# Altium PCB BRK7360.PcbDoc (part 1 of 3)
Units mil, origin at the board's own origin, x right, y up, seen from the top; angles counter-clockwise.
Board outline 7086.61 x 3956.69 mil, 4 copper layers (L1-Top, L2-Plane-1, L3-Plane-2, L4-Bottom), stack 61.722 mil thick; 4 components, 249 nets, 395 pads, 441 vias.
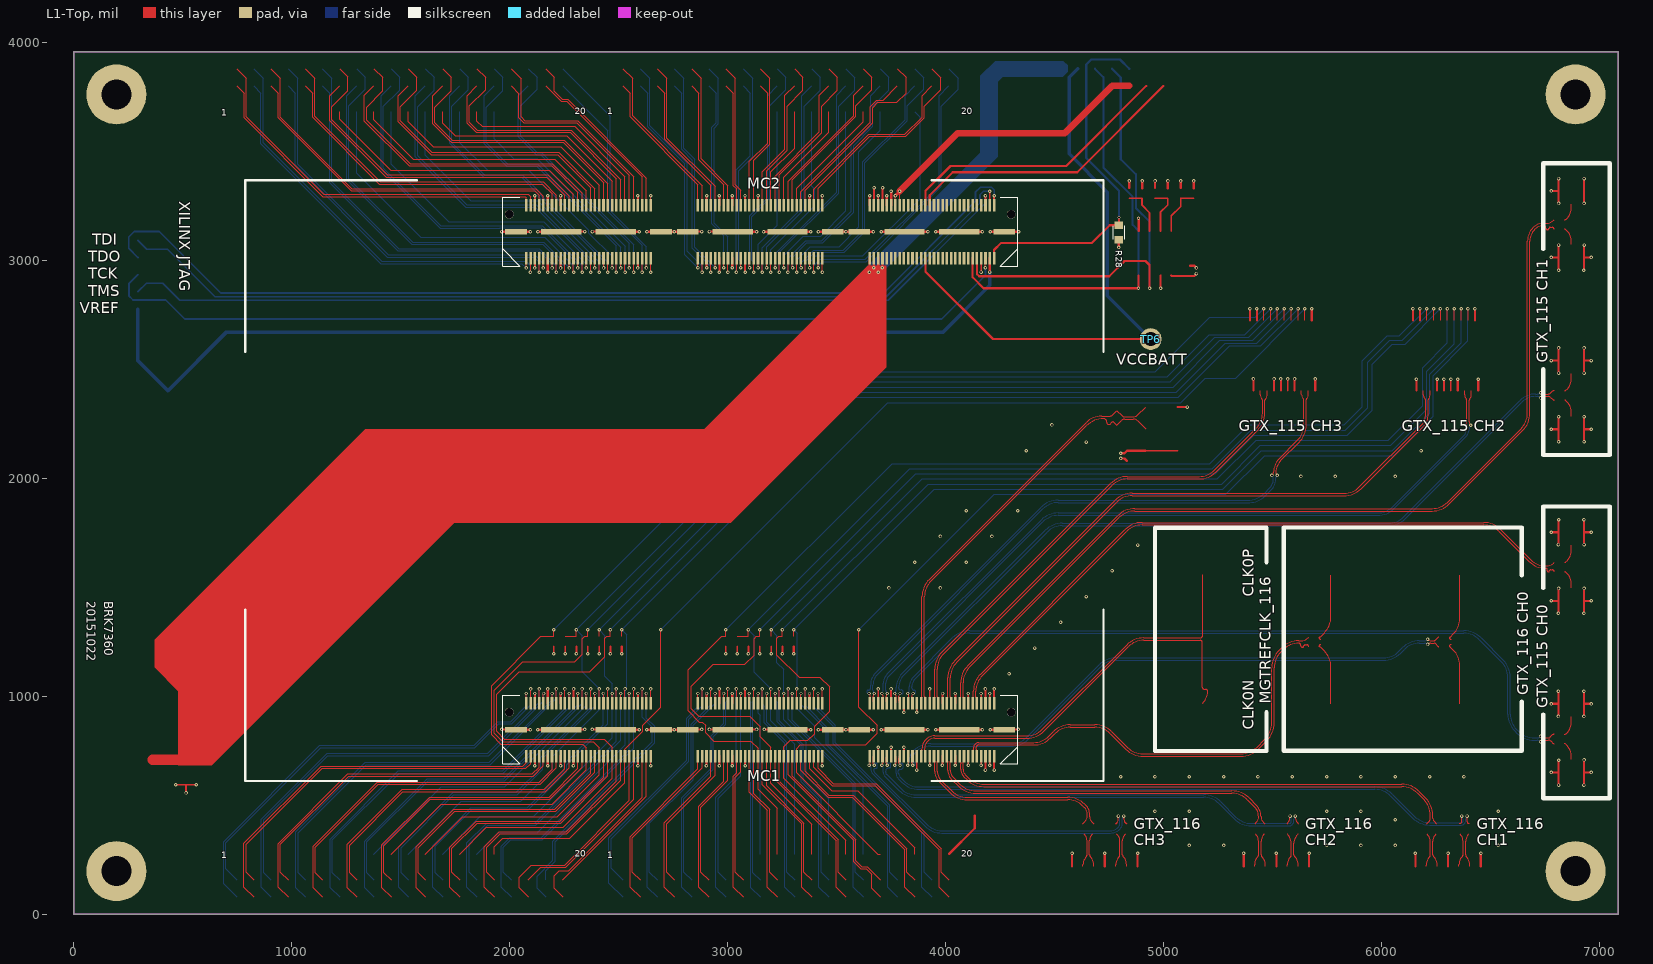
[diagram p0: L1-Top view]
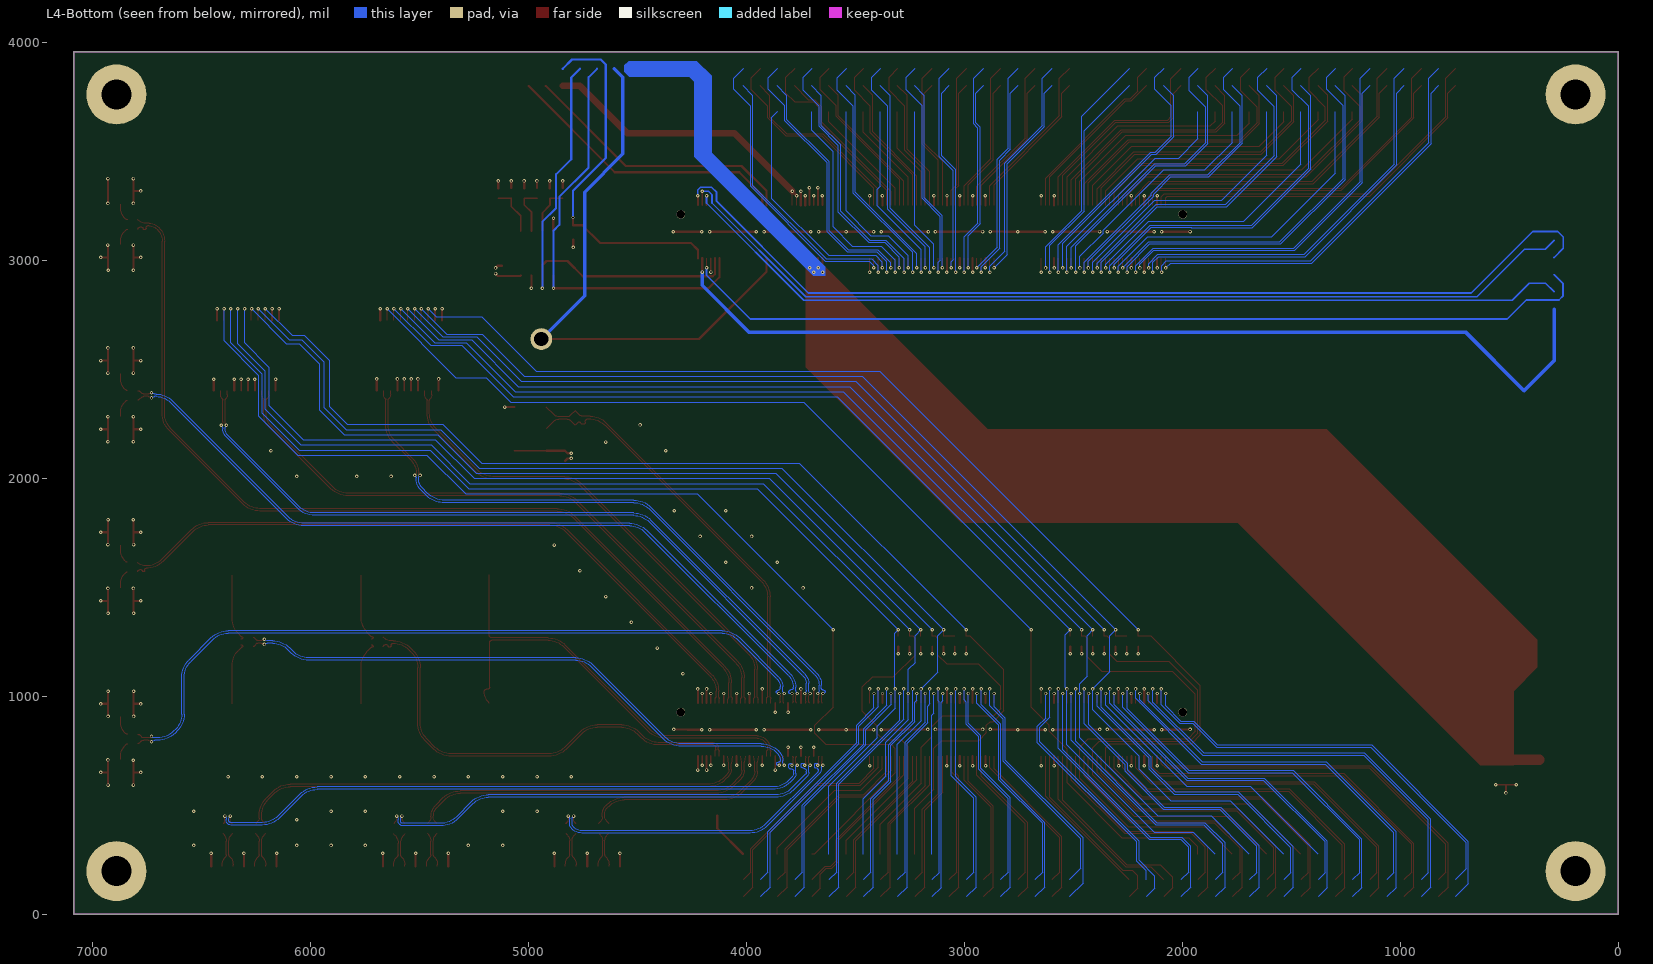
[diagram p1: L4-Bottom view, seen from below]
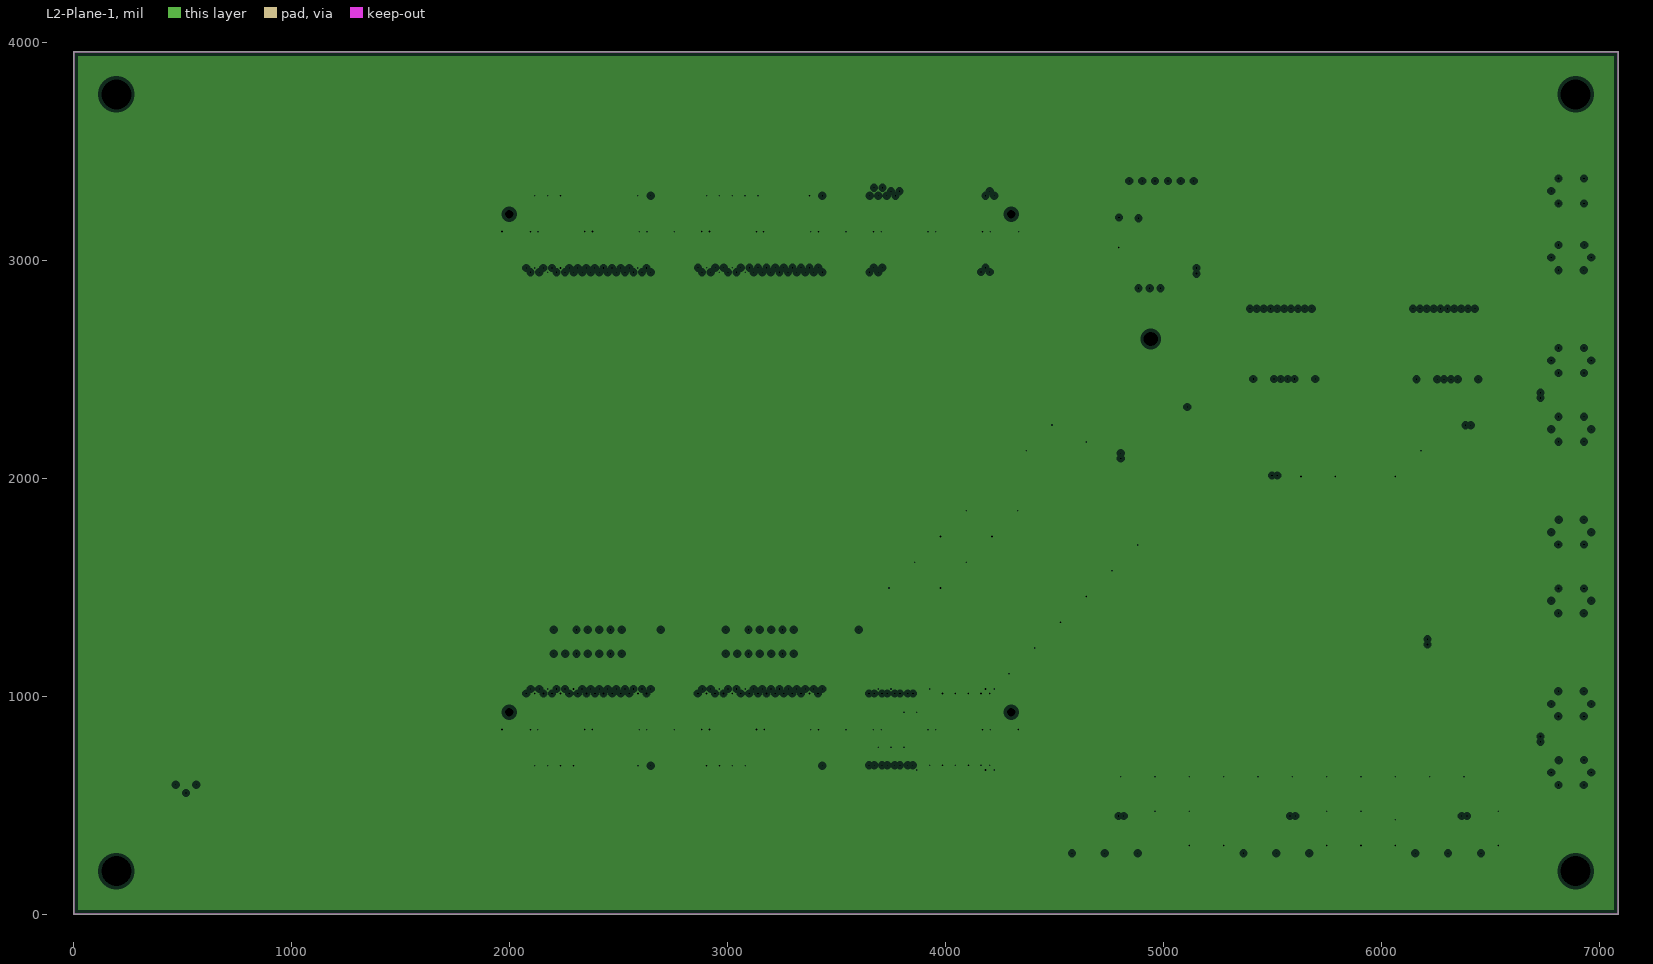
[diagram p2: L2-Plane-1, clearances drawn from the general rule]
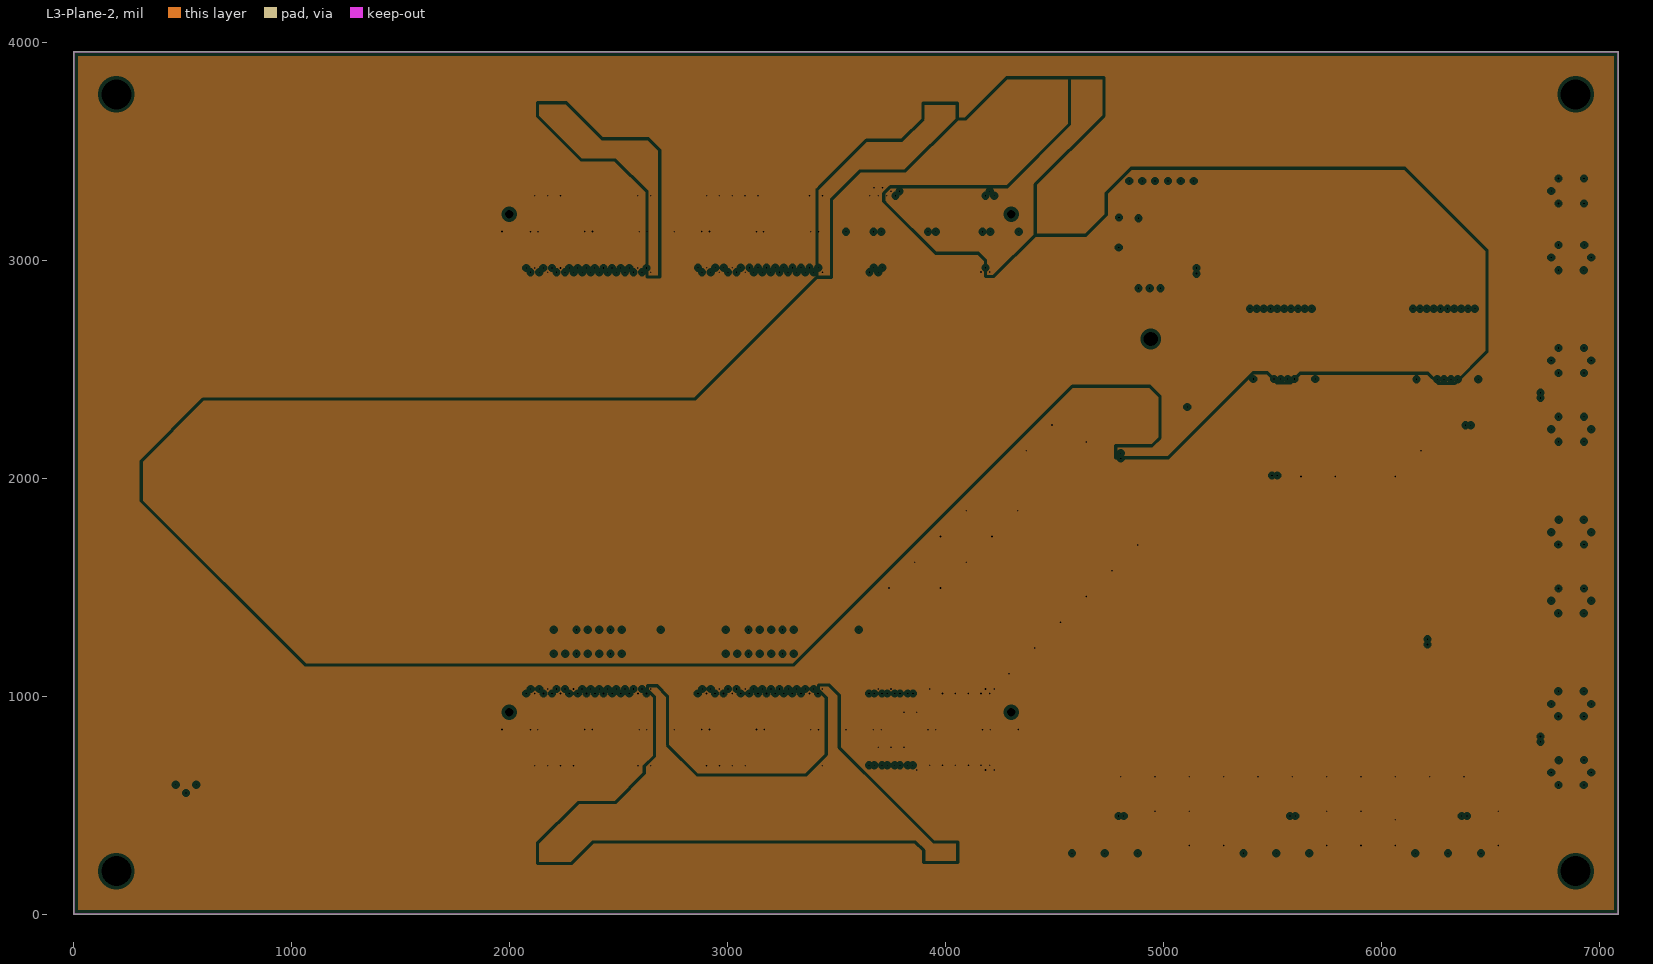
[diagram p3: L3-Plane-2, clearances drawn from the general rule]

## Layer stack, top to bottom
Top Solder: solder mask 0.4, Solder Resist, Dk 3.5
L1-Top: signal copper 1.95
Dielectric1: prepreg 2.268, FR-4, Dk 4.2
Dielectric 5: prepreg 2.268, FR-4, Dk 4.2
L2-Plane-1: plane copper 1.3, net DGND
Dielectric 4: core 14, Dk 4.2
Dielectric 6: core 6.05, Dk 4.2
Dielectric 7: core 6.05, Dk 4.2
Dielectric 8: core 6.05, Dk 4.2
Dielectric 9: core 14, Dk 4.2
L3-Plane-2: plane copper 1.3, net (Multiple Nets)
Dielectric3: prepreg 2.268, FR-4, Dk 4.2
Dielectric 10: prepreg 2.268, FR-4, Dk 4.2
L4-Bottom: signal copper 1.95
Bottom Solder: solder mask 0.4, Solder Resist, Dk 3.5

## Board outline
0,0 0,3956.69 7086.61,3956.69 7086.61,0

## Design rules (kind name [scope] priority, off if disabled: settings)
Clearance [All] p1: gap=5 ignorepadtopadclearanceinfootprint=FALSE except(0: Arc-Hole Track-Hole SMDPad-Hole THPad-Hole Via-Hole Fill-Hole Poly-Hole Region-Hole Text-Hole)
DiffPairsRouting okxDiffRouting100ohm [All] p1: maxlimit=5.98 minlimit=5.98 mostfreqgap=5.98 toplayer_minwidth=5.24 toplayer_maxwidth=5.24 toplayer_prefwidth=5.24 bottomlayer_minwidth=5.24 bottomlayer_maxwidth=5.24 bottomlayer_prefwidth=5.24 maxuncoupledlength=500 // Differential pair spacing for all 100ohm diff routes based on NTI stackup.
FabricationTestPointUsage TestPointUsage [All] p1: valid=0 allowmultiple=FALSE
FabricationTestpoint Testpoint [All] p1: side=3 testpointundercomponent=TRUE minsize=40 maxsize=100 preferedsize=60 minholesize=0 maxholesize=40 preferedholesize=32 testpointgrid=1 allowsidetop=TRUE allowsidebottom=TRUE usegrid=TRUE gridtolerance=0.01
HoleSize [All] p1: absolutevalues=TRUE maxlimit=2160 minlimit=8 maxpercent=80.000 minpercent=20.000
MatchedLengths okMatchedMGTSFP1 [InDifferentialPairClass('okMGTDiffSFP1Match')] p1: tolerance=700 checknetsindiffpair=FALSE checkdiffpairvsdiffpair=TRUE checkxsignals=TRUE checkothers=TRUE
MatchedLengths okMatchedMGTSFP0 [InDifferentialPairClass('okMGTDiffSFP0Match')] p2: tolerance=700 checknetsindiffpair=FALSE checkdiffpairvsdiffpair=TRUE checkxsignals=TRUE checkothers=TRUE
MatchedLengths okMatchedMGTSATA2 [InDifferentialPairClass('okMGTDiffSATA2Match')] p3: tolerance=700 checknetsindiffpair=FALSE checkdiffpairvsdiffpair=TRUE checkxsignals=TRUE checkothers=TRUE
MatchedLengths okMatchedMGTSATA1 [InDifferentialPairClass('okMGTDiffSATA1Match')] p4: tolerance=700 checknetsindiffpair=FALSE checkdiffpairvsdiffpair=TRUE checkxsignals=TRUE checkothers=TRUE
MatchedLengths okMatchedMGTSATA0 [InDifferentialPairClass('okMGTDiffSATA0Match')] p5: tolerance=700 checknetsindiffpair=FALSE checkdiffpairvsdiffpair=TRUE checkxsignals=TRUE checkothers=TRUE
MatchedLengths okMatchedMGTDiffPairs [InNetClass('okMGT')] p6: tolerance=5 checknetsindiffpair=TRUE checkdiffpairvsdiffpair=FALSE checkxsignals=FALSE checkothers=FALSE
MatchedLengths okMatchedMGTRefClkDiffPairs [InNetClass('okMGTRefClk')] p7: tolerance=5 checknetsindiffpair=TRUE checkdiffpairvsdiffpair=FALSE checkxsignals=FALSE checkothers=FALSE // Control skew within MGTREFCLKdiferential pairs.
MatchedLengths okMatchedMGTTX [InDifferentialPairClass('okMGTDiffTXMatch')] p8: tolerance=5000 checknetsindiffpair=TRUE checkdiffpairvsdiffpair=FALSE checkxsignals=FALSE checkothers=FALSE
MatchedLengths okMatchedMGTRX [InDifferentialPairClass('okMGTDiffRXMatch')] p9: tolerance=5000 checknetsindiffpair=TRUE checkdiffpairvsdiffpair=FALSE checkxsignals=FALSE checkothers=FALSE
PlaneClearance [All] p1: clearance=15
PlaneConnect [All] p1: planeconnectstyle=Direct reliefexpansion=20 reliefentries=4 reliefconductorwidth=10 reliefairgap=10
PolygonConnect "Via Connect" [IsVia] p1: connectstyle=Direct reliefconductorwidth=10 reliefentries=4 polygonreliefangle="90 Angle" airgapwidth=10
PolygonConnect [All] p2: connectstyle=Direct reliefconductorwidth=10 reliefentries=4 polygonreliefangle="90 Angle" airgapwidth=10
RoutingVias [All] p1: holewidth=8 width=16 viastyle="Through Hole" minholewidth=8 minwidth=16 maxholewidth=8 maxwidth=16
SilkToSolderMaskClearance SilkscreenOverComponentPads [IsPad] p1: minsilkscreentomaskgap=10 clearancetoexposedcopper=TRUE
SolderMaskExpansion [All] p1: expansion=4
Width [All] p1: maxlimit=50 minlimit=5 preferedwidth=10 minimp=50.000000 maximp=50.000000 favimp=50.000000
Width okxWidthDiff100ohm [(InDifferentialPairClass('All Differential Pairs'))] p2: maxlimit=9.5 minlimit=9.5 preferedwidth=9.5 minimp=50.000000 maximp=50.000000 favimp=50.000000 // 100 ohm differential pair routing based on 4 layer stackup from Saturn
Width okWidth50ohm [All] p3: maxlimit=40 minlimit=12 preferedwidth=12 minimp=50.000000 maximp=50.000000 favimp=50.000000 // 50 ohm SE routing based on 4 layer stackup from Saturn
23 further rules are at their usual default settings.

## Classes and differential pairs
differential pair class okMGTDiffSATA2Match: GTX116_RX3 GTX116_TX3
differential pair class okMGTDiffSATA1Match: GTX116_RX2 GTX116_TX2
differential pair class okMGTDiffSATA0Match: GTX116_RX1 GTX116_TX1
differential pair class okMGTDiffSFP1Match: GTX115_RX2 GTX115_TX2
differential pair class okMGTDiffSFP0Match: GTX115_RX3 GTX115_TX3
net class okMGT: GTX115_REFCLK0N GTX115_REFCLK0P GTX115_RXN0 GTX115_RXN1 GTX115_RXN2 GTX115_RXN3 GTX115_RXP0 GTX115_RXP1 GTX115_RXP2 GTX115_RXP3 GTX115_TXN0 GTX115_TXN1 GTX115_TXN2 GTX115_TXN3 GTX115_TXP0 GTX115_TXP1 GTX115_TXP2 GTX115_TXP3 GTX116_REFCLK0N GTX116_REFCLK0P GTX116_RXN0 GTX116_RXN1 GTX116_RXN2 GTX116_RXN3 GTX116_RXP0 GTX116_RXP1 GTX116_RXP2 GTX116_RXP3 GTX116_TXN0 GTX116_TXN1 GTX116_TXN2 GTX116_TXN3 GTX116_TXP0 GTX116_TXP1 GTX116_TXP2 GTX116_TXP3
differential pair class okMGTDiffPairs: GTX115_REFCLK0 GTX115_RX0 GTX115_RX1 GTX115_RX2 GTX115_RX3 GTX115_TX0 GTX115_TX1 GTX115_TX2 GTX115_TX3 GTX116_REFCLK0 GTX116_RX0 GTX116_RX1 GTX116_RX1_C GTX116_RX2 GTX116_RX2_C GTX116_RX3 GTX116_RX3_C GTX116_TX0 GTX116_TX1 GTX116_TX1_C GTX116_TX2 GTX116_TX2_C GTX116_TX3 GTX116_TX3_C
differential pair class okMGTDiffTXMatch: GTX115_TX0 GTX115_TX1 GTX115_TX2 GTX115_TX3 GTX116_TX0 GTX116_TX1 GTX116_TX2 GTX116_TX3
differential pair class okMGTDiffRXMatch: GTX115_RX0 GTX115_RX1 GTX115_RX2 GTX115_RX3 GTX116_RX0 GTX116_RX1 GTX116_RX2 GTX116_RX3
net class okMGTRefClk: GTX115_REFCLK0N GTX115_REFCLK0P GTX116_REFCLK0N GTX116_REFCLK0P
differential pair GTX116_REFCLK0: +GTX116_REFCLK0P -GTX116_REFCLK0N
differential pair GTX115_REFCLK0: +GTX115_REFCLK0P -GTX115_REFCLK0N
differential pair GTX115_RX0: +GTX115_RXP0 -GTX115_RXN0
differential pair GTX115_RX1: +GTX115_RXP1 -GTX115_RXN1
differential pair GTX115_RX2: +GTX115_RXP2 -GTX115_RXN2
differential pair GTX115_RX3: +GTX115_RXP3 -GTX115_RXN3
differential pair GTX115_TX0: +GTX115_TXP0 -GTX115_TXN0
differential pair GTX115_TX1: +GTX115_TXP1 -GTX115_TXN1
differential pair GTX115_TX2: +GTX115_TXP2 -GTX115_TXN2
differential pair GTX115_TX3: +GTX115_TXP3 -GTX115_TXN3
differential pair GTX116_RX0: +GTX116_RXP0 -GTX116_RXN0
differential pair GTX116_RX1: +GTX116_RXP1 -GTX116_RXN1
differential pair GTX116_RX2: +GTX116_RXP2 -GTX116_RXN2
differential pair GTX116_RX3: +GTX116_RXP3 -GTX116_RXN3
differential pair GTX116_TX0: +GTX116_TXP0 -GTX116_TXN0
differential pair GTX116_TX1: +GTX116_TXP1 -GTX116_TXN1
differential pair GTX116_TX2: +GTX116_TXP2 -GTX116_TXN2
differential pair GTX116_TX3: +GTX116_TXP3 -GTX116_TXN3
differential pair GTX116_RX1_C: +GTX116_RXP1_C -GTX116_RXN1_C
differential pair GTX116_RX2_C: +GTX116_RXP2_C -GTX116_RXN2_C
differential pair GTX116_RX3_C: +GTX116_RXP3_C -GTX116_RXN3_C
differential pair GTX116_TX1_C: +GTX116_TXP1_C -GTX116_TXN1_C
differential pair GTX116_TX2_C: +GTX116_TXP2_C -GTX116_TXN2_C
differential pair GTX116_TX3_C: +GTX116_TXP3_C -GTX116_TXN3_C

## Components (designator, comment, footprint, x,y, rotation, side; value= is the part's Value field where it differs from the comment)
MC1 "QTH-090-01-F-D-A" QTH-090-01-X-D 3149.61,846.46 r0 top locked
MC2 "QTH-090-01-F-D-A" QTH-090-01-X-D 3149.61,3129.92 r0 top locked
R28 "CRCW06030000Z0EA" RESC1608N 4795,3126.54 r90 top value=0
TP6 "VCCBATT" TP_MED 4940.94,2637.8 r0 top

## Footprints (in the part's own frame and the unit in brackets; to place one, negate y for a bottom-side part, rotate by r counter-clockwise, add the part's x,y. Pads: shape width x height; smd on the part's side, far side on the other; paste and mask are expansions set on the pad)
QTH-090-01-X-D [mm]
  rect 2.54x0.64 smd: 0(-28.445,0) 0(-11.555,0) 0(-8.445,0) 0(8.445,0) 0(11.555,0) 0(28.445,0)
  rect 4.7x0.64 smd: 0(-23.175,0) 0(-16.825,0) 0(-3.175,0) 0(3.175,0) 0(16.825,0) 0(23.175,0)
  rect 0.3x1.45 smd: 1(-27.25,3.09) 2(-27.25,-3.09) 3(-26.75,3.09) 4(-26.75,-3.09) 5(-26.25,3.09) 6(-26.25,-3.09) 7(-25.75,3.09) 8(-25.75,-3.09) 9(-25.25,3.09) 10(-25.25,-3.09) 11(-24.75,3.09) 12(-24.75,-3.09) 13(-24.25,3.09) 14(-24.25,-3.09) 15(-23.75,3.09) 16(-23.75,-3.09) 17(-23.25,3.09) 18(-23.25,-3.09) 19(-22.75,3.09) 20(-22.75,-3.09) 21(-22.25,3.09) 22(-22.25,-3.09) 23(-21.75,3.09) 24(-21.75,-3.09) 25(-21.25,3.09) 26(-21.25,-3.09) 27(-20.75,3.09) 28(-20.75,-3.09) 29(-20.25,3.09) 30(-20.25,-3.09) 31(-19.75,3.09) 32(-19.75,-3.09) 33(-19.25,3.09) 34(-19.25,-3.09) 35(-18.75,3.09) 36(-18.75,-3.09) 37(-18.25,3.09) 38(-18.25,-3.09) 39(-17.75,3.09) 40(-17.75,-3.09) 41(-17.25,3.09) 42(-17.25,-3.09) 43(-16.75,3.09) 44(-16.75,-3.09) 45(-16.25,3.09) 46(-16.25,-3.09) 47(-15.75,3.09) 48(-15.75,-3.09) 49(-15.25,3.09) 50(-15.25,-3.09) 51(-14.75,3.09) 52(-14.75,-3.09) 53(-14.25,3.09) 54(-14.25,-3.09) 55(-13.75,3.09) 56(-13.75,-3.09) 57(-13.25,3.09) 58(-13.25,-3.09) 59(-12.75,3.09) 60(-12.75,-3.09) 61(-7.25,3.09) 62(-7.25,-3.09) 63(-6.75,3.09) 64(-6.75,-3.09) 65(-6.25,3.09) 66(-6.25,-3.09) 67(-5.75,3.09) 68(-5.75,-3.09) 69(-5.25,3.09) 70(-5.25,-3.09) 71(-4.75,3.09) 72(-4.75,-3.09) 73(-4.25,3.09) 74(-4.25,-3.09) 75(-3.75,3.09) 76(-3.75,-3.09) 77(-3.25,3.09) 78(-3.25,-3.09) 79(-2.75,3.09) 80(-2.75,-3.09) 81(-2.25,3.09) 82(-2.25,-3.09) 83(-1.75,3.09) 84(-1.75,-3.09) 85(-1.25,3.09) 86(-1.25,-3.09) 87(-0.75,3.09) 88(-0.75,-3.09) 89(-0.25,3.09) 90(-0.25,-3.09) 91(0.25,3.09) 92(0.25,-3.09) 93(0.75,3.09) 94(0.75,-3.09) 95(1.25,3.09) 96(1.25,-3.09) 97(1.75,3.09) 98(1.75,-3.09) 99(2.25,3.09) 100(2.25,-3.09) 101(2.75,3.09) 102(2.75,-3.09) 103(3.25,3.09) 104(3.25,-3.09) 105(3.75,3.09) 106(3.75,-3.09) 107(4.25,3.09) 108(4.25,-3.09) 109(4.75,3.09) 110(4.75,-3.09) 111(5.25,3.09) 112(5.25,-3.09) 113(5.75,3.09) 114(5.75,-3.09) 115(6.25,3.09) 116(6.25,-3.09) 117(6.75,3.09) 118(6.75,-3.09) 119(7.25,3.09) 120(7.25,-3.09) 121(12.75,3.09) 122(12.75,-3.09) 123(13.25,3.09) 124(13.25,-3.09) 125(13.75,3.09) 126(13.75,-3.09) 127(14.25,3.09) 128(14.25,-3.09) 129(14.75,3.09) 130(14.75,-3.09) 131(15.25,3.09) 132(15.25,-3.09) 133(15.75,3.09) 134(15.75,-3.09) 135(16.25,3.09) 136(16.25,-3.09) 137(16.75,3.09) 138(16.75,-3.09) 139(17.25,3.09) 140(17.25,-3.09) 141(17.75,3.09) 142(17.75,-3.09) 143(18.25,3.09) 144(18.25,-3.09) 145(18.75,3.09) 146(18.75,-3.09) 147(19.25,3.09) 148(19.25,-3.09) 149(19.75,3.09) 150(19.75,-3.09) 151(20.25,3.09) 152(20.25,-3.09) 153(20.75,3.09) 154(20.75,-3.09) 155(21.25,3.09) 156(21.25,-3.09) 157(21.75,3.09) 158(21.75,-3.09) 159(22.25,3.09) 160(22.25,-3.09) 161(22.75,3.09) 162(22.75,-3.09) 163(23.25,3.09) 164(23.25,-3.09) 165(23.75,3.09) 166(23.75,-3.09) 167(24.25,3.09) 168(24.25,-3.09) 169(24.75,3.09) 170(24.75,-3.09) 171(25.25,3.09) 172(25.25,-3.09) 173(25.75,3.09) 174(25.75,-3.09) 175(26.25,3.09) 176(26.25,-3.09) 177(26.75,3.09) 178(26.75,-3.09) 179(27.25,3.09) 180(27.25,-3.09)
  round 1.02 hole 1.02 unplated: MH(-29.24,2.03) MH(29.24,2.03)
  silkscreen extent -30,-4 30,4
RESC1608N [mm] "Chip Resistor, Body 1.6x0.8mm, IPC Medium Density"
  rect 0.9x1 smd: 1(-0.85,0) 2(0.85,0)
  silkscreen extent -0.77,-0.68 0.78,0.68, body extent -0.85,-0.48 0.85,0.48, height 0.6
TP_MED [mil] "Testpoint - medium sized"
  round 100 hole 65: 1(0,0)

## Part data
MC1 MC2: library part 000876, "0.5mm hi-speed, high-density header (Female)", Manufacturer=Samtec, Description 2="180-pin, ground plane in middle", Manufacturer_PN=QTH-090-01-F-D-A, partnumber=000876, updated_on="3/23/2015 1:16:30 PM"
R28: library part 000411, "Zero-ohm resistor", Manufacturer=Vishay, ValueFloat=0, Description 2="SM-0603, 1/10W, 20 mOhm max", Manufacturer_PN=CRCW06030000Z0EA, partnumber=000411, updated_on="2/12/2015 9:26:27 AM"
TP6: library part 000265, "Testpoint", Manufacturer="Keystone Electronics", Manufacturer_PN=5007, Description 2="0.063 in. diameter, compact, White", NoLoad=NoLoad, partnumber=000265, updated_on="1/24/2015 12:30:04 PM"

## Free pads (board coordinates)
  round 275.59 hole 137.8: MH(196.85,196.85) MH(196.85,3759.84) MH(6889.76,196.85) MH(6889.76,3759.84)

## Via types
v1: diameter 16, hole 8, L1-Top to L4-Bottom, tented both sides, 441 vias

## Nets (pads, with @x,y where several pads share a name; then routed paths per layer and width w, separated by ;. In a path a pad name is that pad's centre, name@x,y a point inside that pad or via, vN(x,y) a via of type N, cw(c..) or ccw(c..) an arc to the next point about the centre after c; other vN are vias at no path point)
+1.0VDD: MC2.133 MC2.135 | length 1390.7
  L1-Top w5: MC2.133@3769.69,3251.58 3769.69,3294.69 v1(3770,3295) ; v1(3789,3316) 3789.37,3315.63 MC2.135@3789.37,3251.58
  L1-Top w16: v1(3770,3295) 3789,3314 v1(3789,3316)
  L1-Top w30: v1(3789,3316) 4055.68,3582.68 4547.24,3582.68 4763.78,3799.21 4842.52,3799.21
+1.8VDD: MC2.129 MC2.131 MC2.178 | length 4633.2
  L1-Top w12: v1(3730,3295) 3730.31,3294.69 MC2.129@3730.31,3251.58 ; MC2.131@3750,3251.58 v1(3750,3316) ; MC2.178@4202.76,3008.27 4202.76,2945.24 v1(4203,2945)
  L4-Bottom w16: 295.28,2775.59 295.28,2539.37 433.07,2401.57 701.5,2670 3989,2670 4203,2884 v1(4203,2945)
+3.3VDD: MC2.121 MC2.123 MC2.125 MC2.127 MC2.174 | length 311.8
  L1-Top w8: MC2.121@3651.57,3251.58 3651.57,3294.57 v1(3652,3295) ; MC2.123@3671.26,3251.58 3671.26,3331.26 v1(3672,3332) ; MC2.125@3690.94,3251.58 3690.94,3294.94 v1(3691,3295) ; MC2.127@3710.63,3251.58 3710.63,3331.63 v1(3711,3332) ; v1(4163,2945) 4163.39,2945.39 MC2.174@4163.39,3008.27
+5VDC: MC2.122 MC2.124 MC2.126 MC2.128 | length 369.7
  L1-Top w10: v1(3651,2944) 3651.57,2944.57 MC2.122@3651.57,3008.27 ; v1(3671,2965) 3671.26,2965.26 MC2.124@3671.26,3008.27 ; MC2.126@3690.94,3008.27 3690.94,2944.06 v1(3691,2944) ; v1(3710,2965) 3710.63,2965.63 MC2.128@3710.63,3008.27
  L1-Top w48: 362.2,708.66 515.43,708.66 516,708.09
ADC_VN_X: MC2.149 | length 1326.4
  L1-Top w10: MC2.149@3927.17,3251.58 3927.17,3297.17 4033,3403 4603.79,3403 5000,3799.21
ADC_VP_X: MC2.147 | length 1278.9
  L1-Top w10: MC2.147@3907.48,3251.58 3907.48,3316.93 4022.55,3432 4554.05,3432 4921.26,3799.21
DGND: MC1.0 MC1.5 MC1.6 MC1.11 MC1.12 MC1.17 MC1.18 MC1.23 MC1.24 MC1.53 MC1.54 MC1.65 MC1.66 MC1.71 MC1.72 MC1.77 MC1.78 MC1.83 MC1.84 MC1.113 MC1.125 MC1.126 MC1.131 MC1.132 MC1.137 MC1.138 MC1.143 MC1.144 MC1.149 MC1.150 MC1.155 MC1.156 MC1.161 MC1.162 MC1.167 MC1.168 MC1.173 MC1.174 MC1.175 MC1.176 MC1.177 MC1.178 MC1.179 MC1.180 MC2.0 MC2.5 MC2.6 MC2.11 MC2.12 MC2.17 MC2.18 MC2.53 MC2.54 MC2.65 MC2.66 MC2.71 MC2.72 MC2.77 MC2.78 MC2.83 MC2.84 MC2.89 MC2.113 R28.1 | length 7116.3
  L1-Top w8: MC1.126@3690.95,724.8 3690.95,765.95 v1(3691,766) ; MC1.125@3690.95,968.11 3690.95,1032.95 v1(3691,1033) ; MC1.132@3750,724.8 v1(3750,766) ; MC1.131@3750,968.11 v1(3750,1033) ; v1(3809,766) 3809.06,765.94 MC1.138@3809.06,724.8 ; v1(3809,926) v1(3809,926) MC1.137@3809.06,968.11 ; v1(3868,661) 3868.11,661.11 MC1.144@3868.11,724.8 ; v1(3868,926) 3868,968.11 MC1.143@3868.11,968.11 ; v1(3926.89,683) 3927.17,683.28 MC1.150@3927.17,724.8 ; v1(3927,1033) 3927.17,1032.83 MC1.149@3927.17,968.11 ; v1(3985.89,683) 3986.22,683.33 MC1.156@3986.22,724.8 ; v1(3986,1012) 3986.22,1011.78 MC1.155@3986.22,968.11 ; v1(4044.89,683) ccw(c4043.96,683.93) 4045.28,683.93 MC1.162@4045.28,724.8 ; v1(4045,1012) 4045.28,1011.72 MC1.161@4045.28,968.11 ; v1(4104,1012) 4104.33,1011.67 MC1.167@4104.33,968.11 ; MC1.168@4104.33,724.8 4104.33,684.35 ccw(c4106.24,684.35) v1(4104.89,683) ; v1(4163,683) ccw(c4162.07,683.93) 4163.39,683.93 MC1.174@4163.39,724.8 ; v1(4163,1012) 4163.39,1011.61 MC1.173@4163.39,968.11 ; v1(4183,661) v1(4183,661) MC1.176@4183.07,724.8 ; v1(4183,1033) 4183.07,1032.93 MC1.175@4183.07,968.11 ; MC1.178@4202.76,724.8 4202.76,683.24 v1(4203,683) ; MC1.177@4202.76,968.11 4202.76,1011.76 v1(4203,1012) ; MC1.180@4222.44,724.8 4222.44,662.35 ccw(c4224.35,662.35) v1(4223,661) ; MC1.179@4222.44,968.11 4222.44,1032.44 v1(4223,1033)
  L1-Top w10: v1(1964.89,847) 2029.18,847 MC1.0@2029.72,846.46 2030.18,846 v1(2095.89,846) ; v1(1965,3131) 1966.08,3129.92 MC2.0@2029.72,3129.92 2095.92,3129.92 v1(2096,3130) ; v1(2115.89,681) 2116.14,681.25 MC1.6@2116.14,724.8 ; v1(2115.89,1012) 2116.14,1011.75 MC1.5@2116.14,968.11 ; v1(2116,2964) 2116.14,2964.14 MC2.6@2116.14,3008.27 ; v1(2116,3295) 2116.14,3294.86 MC2.5@2116.14,3251.58 ; v1(2129.89,846) 2236.75,846 MC1.0@2237.21,846.46 2237.75,847 v1(2344.89,847) ; v1(2130,3130) 2237.13,3130 2238.13,3131 v1(2345,3131) ; v1(2174.89,681) 2175.2,681.31 MC1.12@2175.2,724.8 ; v1(2174.89,1033) 2175.2,1032.69 MC1.11@2175.2,968.11 ; v1(2175,2944) 2175.2,2944.2 MC2.12@2175.2,3008.27 ; v1(2175,3295) 2175.2,3294.8 MC2.11@2175.2,3251.58 ; v1(2233.89,681) 2234.25,681.36 MC1.18@2234.25,724.8 ; v1(2233.89,1012) 2234.25,1011.64 MC1.17@2234.25,968.11 ; v1(2234,2964) 2234.25,2964.25 MC2.18@2234.25,3008.27 ; v1(2234,3295) 2234.25,3294.75 MC2.17@2234.25,3251.58 ; v1(2292.89,681) 2293.31,681.42 MC1.24@2293.31,724.8 ; MC1.23@2293.31,968.11 2293.31,1032.42 v1(2293.89,1033) ; v1(2379.89,847) 2486.66,847 MC1.0@2487.21,846.46 2487.66,846 v1(2594.89,846) ; v1(2380,3131) 2486.13,3131 2487.13,3130 v1(2595,3130) ; v1(2588,2964) 2588.58,2964.58 MC2.54@2588.58,3008.27 ; v1(2588,3295) 2588.58,3294.42 MC2.53@2588.58,3251.58 ; MC1.54@2588.58,724.8 2588.58,681.31 v1(2588.89,681) ; MC1.53@2588.58,968.11 2588.58,1011.69 v1(2588.89,1012) ; v1(2629.89,846) 2694.23,846 MC1.0@2694.69,846.46 2695.14,846 v1(2755.89,846) 2816.67,846 MC1.0@2817.13,846.46 2817.67,847 v1(2881.89,847) ; v1(2630,3130) v1(2756,3130) 2817.05,3130 2818.05,3131 v1(2882,3131) ; v1(2902.89,681) 2903.54,681.65 MC1.66@2903.54,724.8 ; MC1.65@2903.54,968.11 2903.54,1011.65 v1(2903.89,1012) ; MC2.66@2903.54,3008.27 2903.54,2965.46 v1(2904,2965) ; MC2.65@2903.54,3251.58 2903.54,3294.54 v1(2904,3295) ; v1(2916.89,847) 3024.06,847 MC1.0@3024.61,846.46 3025.15,847 v1(3132.89,847) ; v1(2917,3131) 3023.53,3131 3024.53,3130 v1(3133,3130) ; v1(2961.89,1033) 2962.6,1032.29 MC1.71@2962.6,968.11 ; v1(2962,2944) 2962.6,2944.6 MC2.72@2962.6,3008.27 ; v1(2962,3295) 2962.6,3294.4 MC2.71@2962.6,3251.58 ; MC1.72@2962.6,724.8 2962.6,681.4 v1(2963,681) ; v1(3021,3295) 3021.65,3294.35 MC2.77@3021.65,3251.58 ; MC1.78@3021.65,724.8 3021.65,681.35 v1(3022,681) ; MC1.77@3021.65,968.11 3021.65,1011.76 v1(3021.89,1012) ; MC2.78@3021.65,3008.27 3021.65,2965.35 v1(3022,2965) ; v1(3080,3295) 3080.71,3294.29 MC2.83@3080.71,3251.58 ; MC1.84@3080.71,724.8 3080.71,681.29 v1(3081,681) ; MC1.83@3080.71,968.11 3080.71,1032.82 v1(3080.89,1033) ; MC2.84@3080.71,3008.27 3080.71,2944.29 v1(3081,2944) ; MC2.89@3139.76,3251.58 3139.76,3294.76 v1(3140,3295) ; v1(3165,3130) v1(3382,3130) ; v1(3168,847) 3274.06,847 MC1.0@3274.61,846.46 3275.06,846 v1(3381.89,846) ; v1(3375.89,1012) 3375.98,1011.9 MC1.113@3375.98,968.11 ; MC2.113@3375.98,3251.58 v1(3376,3295) ; v1(3416.89,846) 3481.63,846 MC1.0@3482.09,846.46 3482.54,846 v1(3542.89,846) 3604.07,846 MC1.0@3604.53,846.46 3604.99,846 v1(3668.89,846) ; v1(3417,3130) 3482.01,3130 MC2.0@3482.09,3129.92 3482.16,3130 v1(3543,3130) 3604.45,3130 MC2.0@3604.53,3129.92 3604.61,3130 v1(3669,3130) ; v1(3704.89,846) 3811.55,846 MC1.0@3812.01,846.46 3812.47,846 v1(3918.89,846) ; v1(3705,3130) 3811.93,3130 MC2.0@3812.01,3129.92 3812.09,3130 v1(3919,3130) ; v1(3954.89,846) 4061.55,846 MC1.0@4062.01,846.46 4062.47,846 v1(4168.89,846) ; v1(3955,3130) 4061.93,3130 MC2.0@4062.01,3129.92 4062.09,3130 v1(4169,3130) ; v1(4204.89,846) 4269.03,846 MC1.0@4269.49,846.46 4270.03,847 v1(4333.89,847) ; v1(4205,3130) 4269.41,3130 MC2.0@4269.49,3129.92 4269.57,3130 v1(4336,3130)
  L1-Top w12: v1(4795,3058) R28.1@4795,3093.07
  other v1: 5118.11,314.96 5275.59,314.96 5748.03,314.96 5905.51,314.96 6062.99,314.96 6535.43,314.96 6062.99,433.07 4960.63,472.44 5118.11,472.44 5748.03,472.44 5905.51,472.44 6535.43,472.44 4803.15,629.92 4960.63,629.92 5118.11,629.92 5275.59,629.92 5433.07,629.92 5590.55,629.92 5748.03,629.92 5905.51,629.92 6062.99,629.92 6220.47,629.92 6377.95,629.92 4291.34,1102.36 4409.45,1220.47 4527.56,1338.58 4645.67,1456.69 3740.16,1496.06 3976.38,1496.06 4763.78,1574.8 3858.27,1614.17 4094.49,1614.17 4881.89,1692.91 3976.38,1732.28 4212.6,1732.28 4094.49,1850.39 4330.71,1850.39 5629.92,2007.87 5787.4,2007.87 6062.99,2007.87 4370.08,2125.98 6181.1,2125.98 4645.67,2165.35 4488.19,2244.09
FX3_SCL: MC2.172 | length 2089.6
  L1-Top w10: MC2.172@4143.7,3008.27 4143.7,2936.43 4154.13,2926 4751,2926 4821,2996 4917,2996 4935.63,2977.37 4935.63,2871.37 v1(4936,2871)
  L4-Bottom w10: 4763.78,3877.95 4804,3837.73 4804,3463 4873,3394 4873,3239 4936,3176 v1(4936,2871)
FX3_SDA: MC2.170 | length 2017.1
  L1-Top w10: MC2.170@4124.02,3008.27 4124.02,2920.98 4174,2871 v1(4885,2871) 4885.63,2871.63 4885.63,2929.13
  L4-Bottom w10: 4685.04,3877.95 4724,3838.99 4724,3425 4858,3291 4858,3162 4885,3135 v1(4885,2871)
GTX115_REFCLK0N: MC1.147 | length 1911.8
  L1-Top w5.24: MC1.147@3907.48,968.11 3907.48,989.01 ccw(c3899.01,989.01) 3905,995 cw(c3909.83,999.83) 3903,999.83 3903,1455.58 cw(c4003,1455.58) 3932.29,1526.29 4646.2,2240.2 cw(c4724.85,2161.56) 4724.85,2272.78 cw(c4724.85,2258.63) 4739,2258.63 4739,2256 ccw(c4749,2256) 4749,2246 4750,2246 ccw(c4750,2253.24) 4755.12,2248.12 4762.88,2255.88 cw(c4768,2250.76) 4768,2258 cw(c4768,2251.88) 4772.33,2256.21 4786,2242.54 4808.09,2264.63 cw(c4822,2250.72) 4822,2270.39 4862,2270.39 cw(c4862,2243.41) 4881.08,2262.49 4917.61,2225.95
GTX115_REFCLK0P: MC1.145 | length 1912.9
  L1-Top w5.24: MC1.145@3887.8,968.11 3887.8,988.68 cw(c3895.32,988.68) 3890,994 ccw(c3885.7,998.3) 3891.78,998.3 3891.78,1455.58 cw(c4003,1455.58) 3924.36,1534.22 4644.84,2254.71 cw(c4715.55,2184) 4715.55,2284 4751,2284 ccw(c4751,2307.02) 4767.27,2290.74 4786,2309.46 4808.09,2287.37 ccw(c4822,2301.28) 4822,2281.61 4862,2281.61 ccw(c4862,2308.82) 4881.24,2289.58 4917.61,2325.95
GTX115_RXN0: MC1.171 | length 3135
  L1-Top w5.24: MC1.171@4143.7,968.11 4143.7,986.06 ccw(c4131.06,986.06) 4140,995 cw(c4142.41,997.41) 4139,997.41 4139,1022.58 cw(c4239,1022.58) 4168.29,1093.29 4830.71,1755.71 cw(c4901.42,1685) 4901.42,1785 6467.71,1785 cw(c6467.71,1685) 6538.42,1755.71 6675.89,1618.25 ccw(c6754,1696.36) 6754,1585.89 cw(c6754,1579.89) 6760,1579.89 6760,1575 ccw(c6765,1575) 6765,1570 6766,1570 ccw(c6766,1574) 6770,1574 cw(c6775,1574) 6775,1579 6783,1579 cw(c6783,1570) 6792,1570
GTX115_RXN1: MC1.165 | length 4205.5
  L1-Top w5.24: MC1.165@4084.65,968.11 4084.65,986.2 ccw(c4072.2,986.2) 4081,995 cw(c4083.41,997.41) 4080,997.41 4080,1060.58 cw(c4180,1060.58) 4109.29,1131.29 4797.71,1819.71 cw(c4868.42,1749) 4868.42,1849 6231.8,1849 ccw(c6231.8,1960.22) 6310.39,1881.52 ccw(c6231.8,1960.22) 6310.44,1881.58 6647.64,2218.78 ccw(c6569,2297.42) 6647.7,2218.83 ccw(c6569,2297.42) 6680.22,2297.42 6680.22,3086.63 cw(c6758.72,3086.63) 6703.21,3142.13 cw(c6740.97,3104.37) 6740.97,3157.78 6745.22,3157.78 cw(c6745.22,3150) 6753,3150 6753,3147 ccw(c6760,3147) 6760,3140 6762,3140 ccw(c6762,3146) 6768,3146 cw(c6773,3146) 6773,3151 6782.07,3151 cw(c6782.07,3141.73) 6791.34,3141.73
GTX115_RXN2: MC1.159 | length 2949.4
  L1-Top w5.24: MC1.159@4025.59,968.11 4025.59,985.33 ccw(c4013.33,985.33) 4022,994 cw(c4024.41,996.41) 4021,996.41 4021,1083.58 cw(c4121,1083.58) 4050.29,1154.29 4785.71,1889.71 cw(c4856.42,1819) 4856.42,1919 5827.8,1919 ccw(c5827.8,2030.22) 5906.39,1951.52 ccw(c5827.8,2030.22) 5906.44,1951.58 6193.45,2238.58 ccw(c6146.03,2286) 6213.09,2286 6213.09,2359.59 cw(c6219.14,2359.59) 6214.86,2363.86 6215,2364 ccw(c6195.13,2383.87) 6223.23,2383.87 6223.23,2401.57
GTX115_RXN3: MC1.153 | length 2285.4
  L1-Top w5.24: MC1.153@3966.54,968.11 3966.54,986.46 ccw(c3954.46,986.46) 3963,995 cw(c3965.41,997.41) 3962,997.41 3962,1123.58 cw(c4062,1123.58) 3991.29,1194.29 4763.71,1966.71 cw(c4834.42,1896) 4834.42,1996 5162.8,1996 ccw(c5162.8,2107.22) 5241.39,2028.52 ccw(c5162.8,2107.22) 5241.44,2028.58 5432.48,2219.62 ccw(c5353.84,2298.26) 5465.06,2298.26 5465.06,2356.9 cw(c5475.1,2356.9) 5468,2364 ccw(c5450.63,2381.37) 5475.2,2381.37 5475.2,2401.57
GTX115_RXP0: MC1.169 | length 3135.6
  L1-Top w5.24: MC1.169@4124.02,968.11 4124.02,986.8 cw(c4134.2,986.8) 4127,994 ccw(c4125.12,995.88) 4127.78,995.88 4127.78,1022.58 cw(c4239,1022.58) 4160.36,1101.22 4822.78,1763.64 cw(c4901.42,1685) 4901.42,1796.22 6467.71,1796.22 cw(c6467.71,1685) 6546.36,1763.64 6683.82,1626.18 ccw(c6754,1696.36) 6754,1597.11 6757.34,1597.11 ccw(c6757.34,1642.42) 6789.38,1610.38 6792,1613
GTX115_RXP1: MC1.163 | length 4204.7
  L1-Top w5.24: MC1.163@4064.96,968.11 4064.96,986.66 cw(c4075.34,986.66) 4068,994 ccw(c4066.12,995.88) 4068.78,995.88 4068.78,1060.58 cw(c4180,1060.58) 4101.36,1139.22 4789.78,1827.64 cw(c4868.42,1749) 4868.42,1860.22 6231.8,1860.22 ccw(c6231.8,1960.22) 6302.51,1889.51 6639.71,2226.71 ccw(c6569,2297.42) 6669,2297.42 6669,3086.63 cw(c6758.72,3086.63) 6695.28,3150.07 6696.29,3151.08 cw(c6739.54,3107.84) 6739.54,3169 6756.31,3169 ccw(c6756.31,3214.83) 6788.72,3182.42 6791.34,3185.04
GTX115_RXP2: MC1.157 | length 2949.4
  L1-Top w5.24: MC1.157@4005.91,968.11 4005.91,986.53 cw(c4016.47,986.53) 4009,994 ccw(c4007.12,995.88) 4009.78,995.88 4009.78,1083.58 cw(c4121,1083.58) 4042.36,1162.22 4777.78,1897.64 cw(c4856.42,1819) 4856.42,1930.22 5827.8,1930.22 ccw(c5827.8,2030.22) 5898.51,1959.51 6185.51,2246.51 ccw(c6146.03,2286) 6201.87,2286 6201.87,2359.59 ccw(c6195.73,2359.59) 6200.08,2363.92 6199,2365 cw(c6216.55,2382.55) 6191.73,2382.55 6191.73,2401.57
GTX115_RXP3: MC1.151 | length 2285.2
  L1-Top w5.24: MC1.151@3946.85,968.11 3946.85,986.4 cw(c3957.6,986.4) 3950,994 ccw(c3948.12,995.88) 3950.78,995.88 3950.78,1123.58 cw(c4062,1123.58) 3983.36,1202.22 4755.78,1974.64 cw(c4834.42,1896) 4834.42,2007.22 5162.8,2007.22 ccw(c5162.8,2107.22) 5233.51,2036.51 5424.55,2227.55 ccw(c5353.84,2298.26) 5453.84,2298.26 5453.84,2357.15 ccw(c5444.15,2357.15) 5451,2364 cw(c5468.62,2381.62) 5443.7,2381.62 5443.7,2401.57
GTX115_TXN0: MC1.141 | length 3495
  L1-Top w5.24: MC1.141@3848.43,968.11 cw(c3856.7,976.38) 3845,976.38 3845,997.51 cw(c3865.49,997.51) v1(3851,1012) ; v1(6729,791) cw(c6744.43,775.57) 6744.43,797.39 6765,797.39 cw(c6765,779.02) 6777.98,792.02 6785.61,784.39 ccw(c6791.38,790.16) 6791.38,782
  L4-Bottom w5.24: v1(3851,1012) 3857.17,1012 ccw(c3857.17,1018.83) 3861.99,1013.99 ; 3862,1014 3862.59,1014.59 ccw(c3859.17,1018) 3864,1018 3864,1018.17 ccw(c3857.17,1018.17) 3862.01,1022.99 ; 3862,1023 3860.83,1024.17 ccw(c3854,1017.34) 3854,1027 cw(c3854,1031.83) 3850.59,1028.41 3848,1031 cw(c3855.24,1038.24) 3845,1038.24 3845,1042 cw(c3898.11,1042) 3860.55,1079.55 4039.71,1258.71 cw(c4110.42,1188) 4110.42,1288 6377.58,1288 cw(c6377.58,1188) 6448.29,1258.71 6549.49,1157.51 cw(c6478.78,1086.8) 6578.78,1086.8 6578.78,916.6 ccw(c6685.6,916.6) 6610.07,841.07 6621.17,829.97 ccw(c6699.81,908.61) 6699.81,797.39 6713.57,797.39 cw(c6713.57,775.57) v1(6729,791)
GTX115_TXN1: MC1.135 | length 3671.3
  L1-Top w5.24: MC1.135@3789.37,968.11 cw(c3797.51,976.25) 3786,976.25 3786,999.93 cw(c3803.07,999.93) v1(3791,1012) ; v1(6729,2368) cw(c6744.43,2352.57) 6744.43,2374.39 6764,2374.39 cw(c6764,2356.02) 6776.99,2369.01 6785.17,2360.83 ccw(c6792,2367.66) 6792,2358
  L4-Bottom w5.24: v1(3791,1012) ccw(c3792,1012.02) 3792,1011 3800,1011 ccw(c3800,1016) 3805,1016 3805,1020 ccw(c3796,1020) 3796,1029 3793,1029 cw(c3793,1037) 3785,1037 3785,1040 cw(c3862.25,1040) 3807.63,1094.63 4465.49,1752.49 cw(c4536.2,1681.78) 4536.2,1781.78 6030.71,1781.78 ccw(c6030.71,1893) 6109.36,1814.36 6642.09,2347.09 cw(c6708,2281.18) 6708,2374.39 6713.57,2374.39 cw(c6713.57,2352.57) v1(6729,2368)
GTX115_TXN2: MC1.129 | length 3447.2
  L1-Top w5.24: MC1.129@3730.32,968.11 cw(c3738.32,976.12) 3727,976.12 3727,999.93 cw(c3744.07,999.93) v1(3732,1012) ; v1(6409,2242) cw(c6425.74,2258.74) 6402.07,2258.74 6402.07,2356.92 cw(c6412.08,2356.92) 6405,2364 ccw(c6387.61,2381.39) 6412.2,2381.39 6412.2,2401.57
  L4-Bottom w5.24: v1(3732,1012) cw(c3746.49,1026.49) 3726,1026.49 3726,1058 cw(c3776.7,1058) 3740.85,1093.85 4446.49,1799.49 cw(c4517.2,1728.78) 4517.2,1828.78 5980.58,1828.78 ccw(c5980.58,1940) 6059.22,1861.36 6387.17,2189.3 ccw(c6349.9,2226.57) 6402.61,2226.57 cw(c6424.43,2226.57) v1(6409,2242)
GTX115_TXN3: MC1.123 | length 2825.8
  L1-Top w5.24: MC1.123@3671.26,987.13 MC1.123@3671.26,968.11 cw(c3679.13,975.98) 3668,975.98 3668,999.93 cw(c3685.07,999.93) v1(3673,1012) ; v1(5521,2012) 5519.95,2013.05 cw(c5531.9,2025) 5515,2025 cw(c5594.99,2025) 5538.43,2081.56 5621.46,2164.59 ccw(c5542.81,2243.24) 5654.04,2243.24 5654.04,2359.26 cw(c5660.74,2359.26) 5656,2364 ccw(c5636.27,2383.73) 5664.17,2383.73 5664.17,2401.57
  L4-Bottom w5.24: v1(3673,1012) cw(c3687.49,1026.49) 3667,1026.49 3667,1050.72 cw(c3735.28,1050.72) 3687,1099 4446.49,1858.49 cw(c4517.2,1787.78) 4517.2,1887.78 5394.23,1887.78 ccw(c5394.23,1987.78) 5464.94,1917.07 5494.94,1947.07 ccw(c5445.96,1996.04) 5515.22,1996.04 5515.22,2001.63 cw(c5531.37,2001.63) v1@5519.95,2013.05
GTX115_TXP0: MC1.139 | length 3494.4
  L1-Top w5.24: v1(3827,1012) cw(c3814.93,999.93) 3832,999.93 3832,975.98 cw(c3820.87,975.98) MC1.139@3828.74,968.11 ; v1(6729,815) ccw(c6744.43,830.43) 6744.43,808.61 6765,808.61 ccw(c6765,822.15) 6774.58,812.58 6783.9,821.9 cw(c6791.38,814.43) 6791.38,825
  L4-Bottom w5.24: v1(3827,1012) 3827.26,1012.26 ccw(c3811.52,1028) 3833.78,1028 3833.78,1042 cw(c3898.11,1042) 3852.62,1087.49 4031.78,1266.64 cw(c4110.42,1188) 4110.42,1299.22 6377.58,1299.22 cw(c6377.58,1188) 6456.22,1266.64 6557.42,1165.44 cw(c6478.78,1086.8) 6590,1086.8 6590,916.6 ccw(c6685.6,916.6) 6618,849 6629.1,837.9 ccw(c6699.81,908.61) 6699.81,808.61 6713.57,808.61 ccw(c6713.57,830.43) v1(6729,815)
GTX115_TXP1: MC1.133 | length 3669.7
  L1-Top w5.24: v1(3767,1012) cw(c3752.51,997.51) 3773,997.51 3773,976.11 cw(c3761.68,976.11) MC1.133@3769.69,968.11 ; v1(6729,2392) ccw(c6744.43,2407.43) 6744.43,2385.61 6764,2385.61 ccw(c6764,2403.98) 6776.99,2390.99 6783.46,2397.46 cw(c6792,2388.93) 6792,2401
  L4-Bottom w5.24: v1@3770.8,1015.8 v1(3767,1012) ccw(c3750.63,1028.37) 3773.78,1028.37 3773.78,1040 cw(c3862.26,1040) 3799.69,1102.56 4457.56,1760.42 cw(c4536.2,1681.78) 4536.2,1793 6030.71,1793 ccw(c6030.71,1893) 6101.42,1822.29 6634.15,2355.02 cw(c6708,2281.18) 6708,2385.61 6713.57,2385.61 ccw(c6713.57,2407.43) v1(6729,2392)
GTX115_TXP2: MC1.127 | length 3447.4
  L1-Top w5.24: v1(3708,1012) cw(c3693.51,997.51) 3714,997.51 3714,976.25 cw(c3702.5,976.25) MC1.127@3710.63,968.11 ; 6380.71,2401.57 6380.71,2381.6 ccw(c6405.6,2381.6) 6388,2364 cw(c6381.13,2357.13) 6390.85,2357.13 6390.85,2256.11 cw(c6370.89,2256.11) v1(6385,2242)
  L4-Bottom w5.24: v1(3708,1012) ccw(c3691.63,1028.37) 3714.78,1028.37 3714.78,1058 cw(c3776.7,1058) 3732.92,1101.78 4438.56,1807.42 cw(c4517.2,1728.78) 4517.2,1840 5980.58,1840 ccw(c5980.58,1940) 6051.29,1869.29 6379.24,2197.24 ccw(c6349.9,2226.57) 6391.39,2226.57 ccw(c6369.57,2226.57) v1(6385,2242)
GTX115_TXP3: MC1.121 | length 2821.8
  L1-Top w5.24: v1(3649,1012) cw(c3634.51,997.51) 3655,997.51 3655,976.38 cw(c3643.31,976.38) MC1.121@3651.58,968.11 ; v1(5497,2012) 5499.38,2014.38 ccw(c5488.76,2025) 5503.78,2025 cw(c5594.99,2025) 5530.49,2089.49 5613.53,2172.53 ccw(c5542.81,2243.24) 5642.81,2243.24 5642.81,2359.62 ccw(c5636.62,2359.62) 5641,2364 cw(c5661.09,2384.09) 5632.68,2384.09 5632.68,2401.57
  L4-Bottom w5.24: v1(3649,1012) 3648,1012 cw(c3648,1021) 3639,1021 cw(c3646,1021) 3646,1028 3649,1028 ccw(c3649,1034.78) 3655.78,1034.78 3655.78,1050.72 cw(c3735.28,1050.72) 3679.07,1106.93 4438.56,1866.42 cw(c4517.2,1787.78) 4517.2,1899 5384.93,1899 ccw(c5384.93,2010.22) 5463.58,1931.58 5487,1955 ccw(c5445.96,1996.04) 5504,1996.04 5504,1999 ccw(c5489.52,1999) 5499.76,2009.24 v1(5497,2012)
GTX116_REFCLK0N: MC1.148 | length 1822
  L1-Top w5.24: MC1.148@3907.48,724.8 3907.48,745.01 ccw(c3899.01,745.01) 3905,751 cw(c3909.83,755.83) 3903,755.83 3903,757 cw(c3953.7,757) 3917.85,792.85 3918,793 cw(c3951.27,759.73) 3951.27,806.78 4372.71,806.78 ccw(c4372.71,918) 4451.36,839.36 4838.41,1226.41 cw(c4909.12,1155.7) 4909.12,1255.7 5168.58,1255.7 cw(c5168.58,1246.28) 5178,1246.28 5178,1040.8 ccw(c5186.9,1040.8) 5186.9,1031.9 5192.5,1031.9 cw(c5192.5,1022.2) 5202.2,1022.2 cw(c5123.5,1022.2) 5179.15,966.55 5178.74,966.14
GTX116_REFCLK0P: MC1.146 | length 1817.9
  L1-Top w5.24: MC1.146@3887.8,724.8 3887.8,745.68 cw(c3895.32,745.68) 3890,751 ccw(c3885.7,755.3) 3891.78,755.3 3891.78,757 cw(c3953.7,757) 3909.92,800.78 3910.07,800.93 cw(c3951.27,759.73) 3951.27,818 4372.71,818 ccw(c4372.71,918) 4443.42,847.29 4830.48,1234.34 cw(c4909.12,1155.7) 4830.53,1234.4 cw(c4909.12,1155.7) 4909.12,1266.92 5168.6,1266.92 ccw(c5168.6,1277.22) 5178.9,1277.22 5178.9,1556.69 5178.74,1556.69
GTX116_RXN0: MC1.172 | length 2062.7
  L1-Top w5.24: MC1.172@4143.7,724.8 4143.7,746.89 ccw(c4137.89,746.89) 4142,751 cw(c4146.83,755.83) 4140,755.83 4140,764.76 cw(c4150.24,764.76) 4143,772 cw(c4152.12,762.88) 4152.12,775.78 4403.71,775.78 ccw(c4403.71,887) 4482.36,808.36 4501.71,827.71 cw(c4572.42,757) 4572.42,857 4684.71,857 cw(c4684.71,757) 4755.42,827.71 4826.78,756.36 ccw(c4905.42,835) 4905.42,723.78 5355.58,723.78 ccw(c5355.58,835) 5434.22,756.36 5475.42,797.56 ccw(c5396.78,876.2) 5508,876.2 5508,1130.58 cw(c5608,1130.58) 5537.29,1201.29 5549.6,1213.6 cw(c5620.31,1142.89) 5620.31,1242.89 cw(c5620.31,1234.2) 5629,1234.2 5629,1232 ccw(c5636,1232) 5636,1225 5639,1225 ccw(c5639,1230) 5644,1230 cw(c5650,1230) 5650,1236 5656.35,1236 cw(c5656.35,1227) 5665.35,1227
GTX116_RXN1: MC1.166 | length 2366.6
  L1-Top w5.24: MC1.166@4084.65,724.8 4080.5,690 4080.5,664.35 ccw(c4116.35,664.35) 4091,639 4104.49,625.51 ccw(c4175.2,696.22) 4175.2,596.22 6092.58,596.22 cw(c6092.58,485) 6171.22,563.64 6202.53,532.33 cw(c6123.89,453.69) 6235.11,453.69 6235.11,440 ccw(c6255.6,440) 6241.11,425.51 6251,415.62
GTX116_RXN2: MC1.160 | length 1630.7
  L1-Top w5.24: 5392.24,532.67 5424.81,500.1 cw(c5370.72,446) 5447.22,446 ccw(c5482.46,446) 5457.54,421.08 5463,415.62
  L1-Top w5.25: MC1.160@4025.59,724.8 4021,696 4021,661 ccw(c4069.28,661) 4035.14,626.86 4067.46,594.54 ccw(c4138.17,665.25) 4138.17,565.25 5313.58,565.25 cw(c5313.58,454) 5392.24,532.67
GTX116_RXN3: MC1.154 | length 913.7
  L1-Top w5.24: 4660.61,461.94 4660.61,446 ccw(c4688.64,446) 4668.82,426.18 4680,415
  L1-Top w5.25: MC1.154@3966.54,724.8 3962,696 3962,656 ccw(c4019.94,656) 3978.97,615.03 4028.46,565.54 ccw(c4099.17,636.25) 4099.17,536.25 4559.58,536.25 cw(c4559.58,425) 4638.24,503.67 4646.96,494.96 cw(c4613.95,461.95) 4660.62,461.95
GTX116_RXP0: MC1.170 | length 2062.8
  L1-Top w5.24: MC1.170@4124.02,724.8 4124.02,746.21 cw(c4130.79,746.21) MC1.170@4125.99,750.99 ; MC1.170@4126,751 4126.5,751.5 ccw(c4121,757) 4128.78,757 4128.78,764.76 cw(c4150.24,764.76) 4135.07,779.93 cw(c4152.12,762.88) 4152.12,787 4403.71,787 ccw(c4403.71,887) 4474.42,816.29 4493.78,835.64 cw(c4572.42,757) 4572.42,868.22 4684.71,868.22 cw(c4684.71,757) 4763.36,835.64 4834.71,764.29 ccw(c4905.42,835) 4905.42,735 5355.58,735 ccw(c5355.58,835) 5426.29,764.29 5467.49,805.49 ccw(c5396.78,876.2) 5496.78,876.2 5496.78,1130.58 cw(c5608,1130.58) 5529.36,1209.22 5541.67,1221.53 cw(c5620.31,1142.89) 5620.31,1254.11 5631,1254.11 ccw(c5631,1298.69) 5662.52,1267.17 5665.35,1270
GTX116_RXP1: MC1.164 | length 2366.6
  L1-Top w5.24: MC1.164@4064.96,724.8 4069.28,690 4069.28,664.35 ccw(c4116.35,664.35) 4083.07,631.07 4096.56,617.58 ccw(c4175.2,696.22) 4175.2,585 6092.58,585 cw(c6092.58,485) 6163.29,555.71 6194.6,524.4 cw(c6123.89,453.69) 6223.89,453.69 6223.89,440 cw(c6203.4,440) 6217.89,425.51 6208,415.62
GTX116_RXP2: MC1.158 | length 1630.7
  L1-Top w5.24: 5384.29,524.71 5416.91,492.09 cw(c5370.82,446) 5436,446 cw(c5401.29,446) 5425.83,421.46 5420,415.62
  L1-Top w5.25: MC1.158@4005.91,724.8 4009.75,696 4009.75,661 ccw(c4069.28,661) 4027.19,618.9 4059.51,586.58 ccw(c4138.17,665.25) 4138.17,554 5313.58,554 cw(c5313.58,454) 5384.29,524.71
GTX116_RXP3: MC1.152 | length 913.6
  L1-Top w5.24: 4630,415 4641.18,426.18 ccw(c4621.36,446) 4649.39,446 4649.39,461.94
  L1-Top w5.25: MC1.152@3946.85,724.8 3950.75,696.19 3950.75,656 ccw(c4019.94,656) 3971.02,607.07 4020.51,557.58 ccw(c4099.17,636.25) 4099.17,525 4559.58,525 cw(c4559.58,425) 4630.29,495.71 4639,487 cw(c4613.95,461.95) 4649.38,461.95
GTX116_TXN0: MC1.142 | length 2722.5
  L1-Top w5.24: MC1.142@3848.43,724.8 ccw(c3856.7,716.53) 3845,716.53 3845,695.07 ccw(c3862.07,695.07) v1(3850,683) ; v1(6211,1237) cw(c6226.43,1221.57) 6226.43,1243.39 6241,1243.39 cw(c6241,1237.09) 6245.45,1241.55 ; 6245.46,1241.54 6258.32,1228.68 ccw(c6262.38,1232.74) 6262.38,1227
  L4-Bottom w5.24: 3845,704 ccw(c3852,704) 3852,697 3855,697 cw(c3855,690) 3862,690 cw(c3855,690) 3855,683 v1(3850,683) ; 3845,704 cw(c3895.7,704) 3859.85,739.85 3860.49,740.49 cw(c3931.2,669.78) 3931.2,769.78 4300.71,769.78 ccw(c4300.71,881) 4379.36,802.36 4712.49,1135.49 cw(c4783.2,1064.78) 4783.2,1164.78 6008.71,1164.78 ccw(c6008.71,1276) 6087.36,1197.36 6103.1,1213.1 cw(c6173.81,1142.39) 6173.81,1242.39 6197.99,1242.39 cw(c6197.99,1223.99) v1(6211,1237)
GTX116_TXN1: MC1.136 | length 2863.4
  L1-Top w5.24: MC1.136@3789.37,724.8 ccw(c3797.51,716.67) 3786,716.67 3786,695.07 ccw(c3803.07,695.07) v1(3791,683) ; 6358,415.62 ccw(c6358,425.62) 6368,425.62 v1(6368,450)
  L4-Bottom w5.24: v1(3791,683) 3791,684 cw(c3798,684) 3798,691 cw(c3798,683) 3806,683 3806,676 cw(c3795,676) 3795,665 3791,665 ccw(c3791,658) 3784,658 3784,647.31 ccw(c3811.31,647.31) 3791.99,628.01 3807.49,612.51 ccw(c3878.2,683.22) 3878.2,583.22 5969.71,583.22 cw(c5969.71,472) 6048.36,550.64 6149.71,449.29 ccw(c6220.42,520) 6220.42,420 6366,420 ccw(c6366,428.39) 6374.39,428.39 6374.39,434.57 ccw(c6352.57,434.57) v1(6368,450)
GTX116_TXN2: MC1.130 | length 2135.9
  L1-Top w5.24: MC1.130@3730.32,724.8 ccw(c3738.32,716.8) 3727,716.8 3727,695.07 ccw(c3744.07,695.07) v1(3732,683) ; 5567,415 ccw(c5535.62,446.38) 5580,446.38 v1(5580,450)
  L4-Bottom w5.24: v1(3732,683) cw(c3741,683) 3741,692 3742,692 cw(c3742,685) 3749,685 3749,679 cw(c3741,679) 3741,671 ccw(c3741,655) 3725,655 3725,651.36 ccw(c3740.36,651.36) 3729.5,640.5 3793.49,576.51 ccw(c3864.2,647.22) 3864.2,547.22 5183.71,547.22 cw(c5183.71,436) 5262.36,514.64 5331.71,445.29 ccw(c5402.42,516) 5402.42,416 5576.39,416 ccw(c5576.39,426) 5586.39,426 5586.39,434.57 ccw(c5564.57,434.57) v1(5580,450)